# EAGLE board VusbPlusWiggle0602 (EAGLE 5.07)
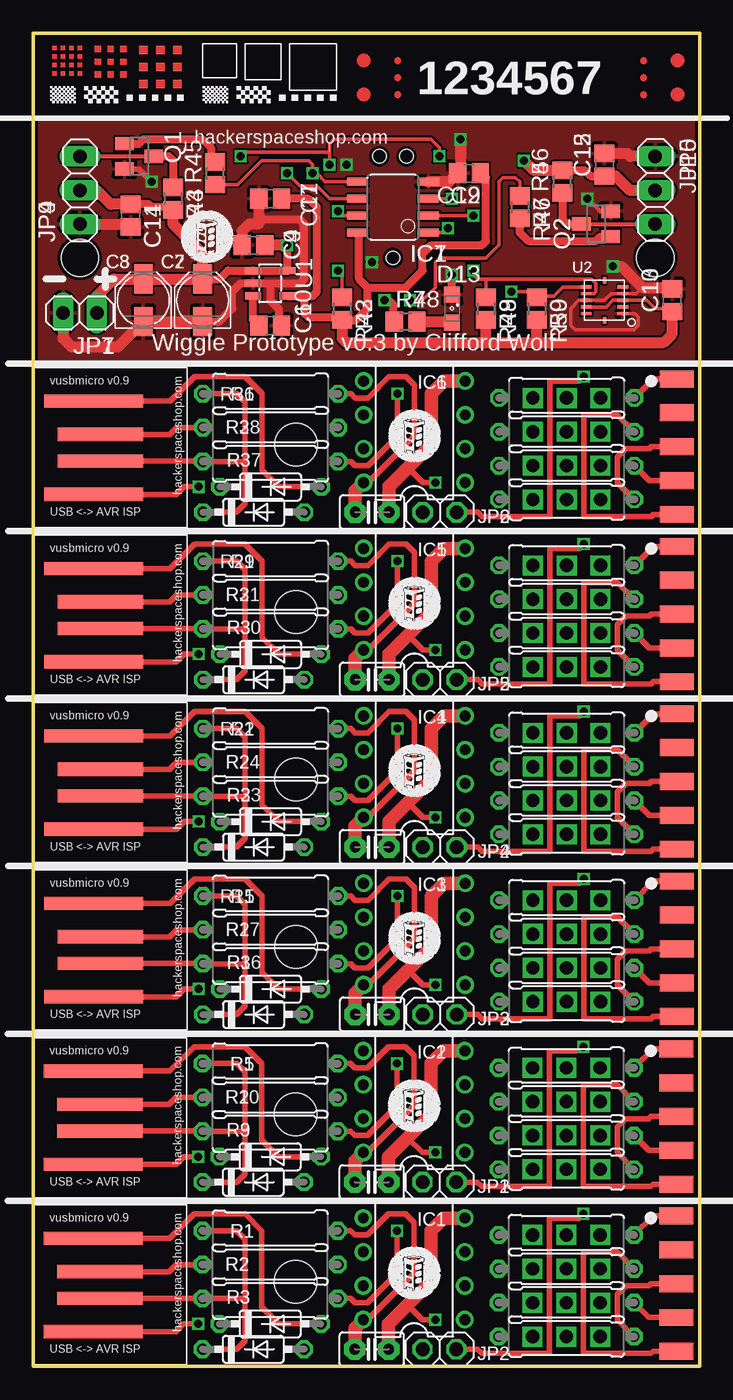
[diagram p0: board, top side]
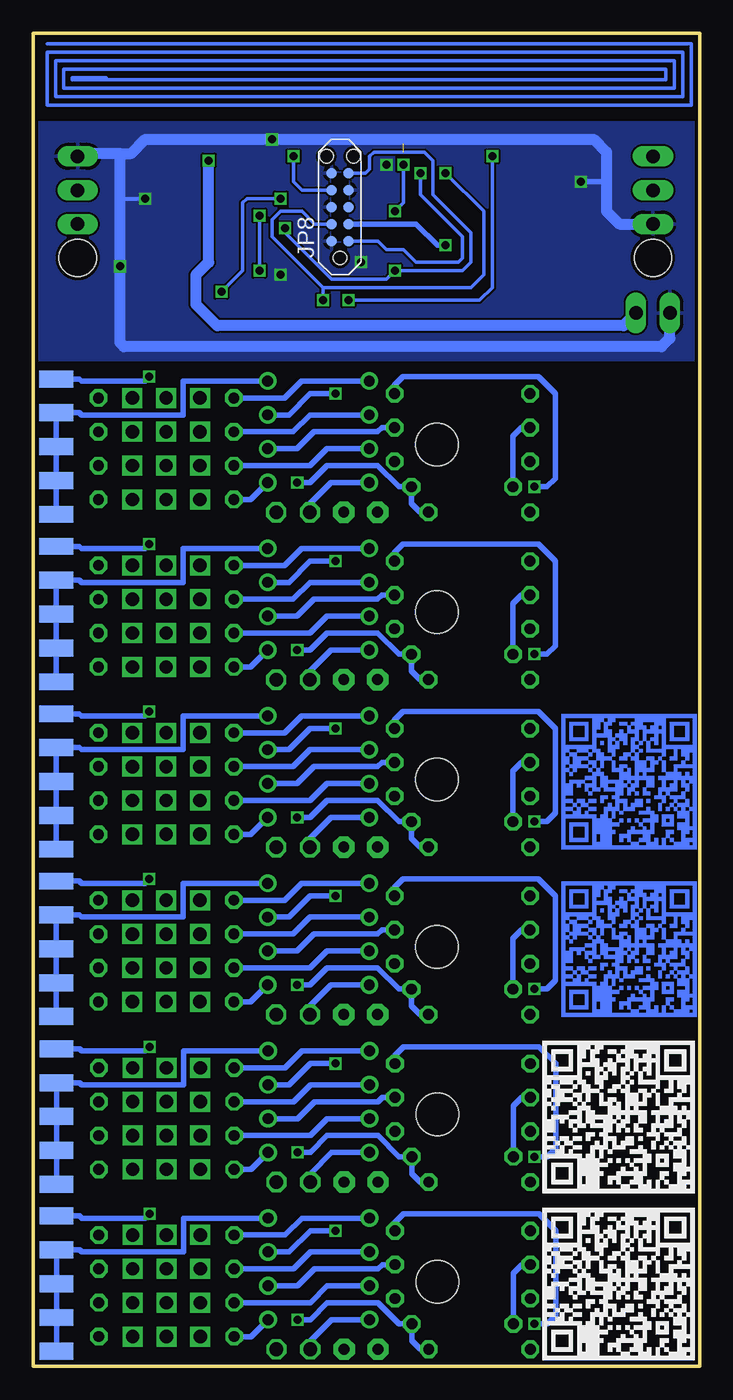
[diagram p1: board, bottom side, seen from below]

Size 50 x 100 mm. Coordinates in mm from the lower left corner, seen from the top.
Outline: 0,100 50,100 50,0 0,0 0,100
Copper layers (1*16): Top 0.035mm / dielectric 1.5mm / Bottom 0.035mm
Design rules "seeed": minimum track width 6mil, minimum drill 12mil, track to track 6mil, track to pad 6mil, pad to pad 6mil, via to via 6mil, smd to smd 0mil, copper to edge 10mil, drill to drill 10mil, minimum pad ring 10mil, minimum via ring 6mil, stop-mask expansion 2mil, vias tented up to drill 100mil, thermal gap 10mil
Net classes: 1 pwr: width 0.254 mm
Holes 3.2 mm at 19.68,6.35 19.68,18.89 19.71,31.47 19.71,44.03 19.71,56.59 19.71,69.15
Holes 2.8 mm at 3.5,83.15 46.67,83.15

## Footprints (pad centres in the part's own frame; a part is rotated, then mirrored left to right if it is on the bottom)
C2.5-2 = drill 0.813 pad 1.6 octagon: 1 -1.27,0; 2 1.27,0
PANASONIC_B = smd 2.2 x 1.4: + 1.6,0; - -1.6,0
C0805 = smd 1.3 x 1.5: 1 -0.85,0; 2 0.85,0
DO35-7 = drill 0.813 octagon: A 3.81,0; C -3.81,0
SML0805 = smd 1.2 x 1.2: A 1.05,0; C -1.05,0
DIL08 = drill 0.813 round: 1 -3.81,-3.81; 2 -1.27,-3.81; 3 1.27,-3.81; 4 3.81,-3.81; 5 3.81,3.81; 6 1.27,3.81; 7 -1.27,3.81; 8 -3.81,3.81
8S1 = smd 0.6 x 1.6: 1 -1.905,-2.654; 2 -0.645,-2.654; 3 0.625,-2.654; 4 1.895,-2.654; 5 1.905,2.654; 6 0.635,2.654; 7 -0.635,2.654; 8 -1.905,2.654
1X02 = drill 1.016 octagon: 1 -1.27,0; 2 1.27,0
1X02' = drill 1.016 long: 1 -1.27,0; 2 1.27,0
TC2050-IDC-NL = smd 0.787 x 0.787: 1 1.27,-0.635; 2 2.54,-0.635; 3 3.81,-0.635; 4 5.08,-0.635; 5 6.35,-0.635; 6 6.35,0.635; 7 5.08,0.635; 8 3.81,0.635; 9 2.54,0.635; 10 1.27,0.635 | hole 1.016: 0,0; 7.62,1.016; 7.62,-1.016
1X03 = drill 1.016 long: 1 -2.54,0; 2 0,0; 3 2.54,0
SMD1,27-2,54 = smd 1.27 x 2.54: 1 0,0
SOT23 = smd 1 x 1.4: 1 -0.95,-1.1; 2 0.95,-1.1; 3 0,1.1
0309/10 = drill 0.813 octagon: 1 -5.08,0; 2 5.08,0
R0805 = smd 1.3 x 1.5: 1 -0.85,0; 2 0.85,0
SOT23-5L = smd 0.55 x 1.2: 1 -0.95,-1.3; 2 0,-1.3; 3 0.95,-1.3; 4 0.95,1.3; 5 -0.95,1.3
DFN10 = smd 0.8 x 0.25: 1 -1.375,1; 2 -1.375,0.5; 3 -1.375,0; 4 -1.375,-0.5; 5 -1.375,-1; 6 1.375,-1; 7 1.375,-0.5; 8 1.375,0; 9 1.375,0.5; 10 1.375,1 | smd 0.25 x 0.5: 11 0,-1.5; 12 0,1.5
USB_A_EDGE = smd 6.41 x 1: P$1 0,1; P$2 0,-1 | smd 7.41 x 1: P$3 -0.5,3.5; P$4 -0.5,-3.5

## Placement (x,y rotation side)
C1  0.1uF  [C2.5-2]  25.4,1.27 180 top
C2  0.1uF  [C2.5-2]  25.4,13.81 180 top
C3  0.1uF  [C2.5-2]  25.43,26.39 180 top
C4  0.1uF  [C2.5-2]  25.43,38.95 180 top
C5  0.1uF  [C2.5-2]  25.43,51.51 180 top
C6  0.1uF  [C2.5-2]  25.43,64.07 180 top
C7  10u  [PANASONIC_B]  12.7,79.97 90 top
C8  1u  [PANASONIC_B]  8.26,79.97 90 top
C9  100n  [C0805]  16.51,84.1 180 top
C10  10n  [C0805]  17.78,78.07 0 top
C11  100n  [C0805]  17.78,87.59 180 top
C12  100n  [C0805]  32.7,89.5 180 top
C13  100n  [C0805]  47.95,79.97 90 top
C14  100n  [C0805]  7.3,86.32 270 top
C15  100n  [C0805]  42.87,90.13 90 top
D1  ZD3V6  [DO35-7]  16.51,1.27 0 top
D2  ZD3V6  [DO35-7]  17.78,3.17 0 top
D3  ZD3V6  [DO35-7]  16.51,13.81 0 top
D4  ZD3V6  [DO35-7]  17.78,15.72 0 top
D5  ZD3V6  [DO35-7]  16.54,26.39 0 top
D6  ZD3V6  [DO35-7]  17.81,28.29 0 top
D7  ZD3V6  [DO35-7]  16.54,38.95 0 top
D8  ZD3V6  [DO35-7]  17.81,40.85 0 top
D9  ZD3V6  [DO35-7]  16.54,51.51 0 top
D10  ZD3V6  [DO35-7]  17.81,53.41 0 top
D11  ZD3V6  [DO35-7]  16.54,64.07 0 top
D12  ZD3V6  [DO35-7]  17.81,65.98 0 top
D13  [SML0805]  31.43,79.34 270 top
E$1  [QR_TOP]  10.34,26.24 0 bottom
E$2  [QR_TOP]  10.34,38.8 0 bottom
E$3  [QR_TSTOP]  10.34,51.2 0 bottom
E$4  [QR_TSTOP]  10.34,63.76 0 bottom
IC1  ATTINY45  [DIL08]  28.57,7.3 90 top
IC2  ATTINY45  [DIL08]  28.57,19.84 90 top
IC3  ATTINY45  [DIL08]  28.6,32.42 90 top
IC4  ATTINY45  [DIL08]  28.6,44.98 90 top
IC5  ATTINY45  [DIL08]  28.6,57.54 90 top
IC6  ATTINY45  [DIL08]  28.6,70.1 90 top
IC7  TINY13V-10SSU  [8S1]  26.99,86.96 90 top
JP1  VCC-jumper  [1X02]  30.48,13.81 0 top
JP2  VCC-jumper  [1X02]  30.48,1.27 0 top
JP3  VCC-jumper  [1X02]  30.51,26.39 0 top
JP4  VCC-jumper  [1X02]  30.51,38.95 0 top
JP5  VCC-jumper  [1X02]  30.51,51.51 0 top
JP6  VCC-jumper  [1X02]  30.51,64.07 0 top
JP7  [1X02']  3.5,79.02 180 top
JP8  [TC2050-IDC-NL]  26.99,83.15 90 bottom
JP9  [1X03]  3.5,88.23 90 top
JP10  [1X03]  46.67,88.23 270 top
PAD1-VCC  [SMD1,27-2,54]  48.26,11.27 90 bottom
PAD1-VCC1  [SMD1,27-2,54]  48.26,23.81 90 bottom
PAD1-VCC2  [SMD1,27-2,54]  48.29,36.39 90 bottom
PAD1-VCC3  [SMD1,27-2,54]  48.29,48.95 90 bottom
PAD1-VCC4  [SMD1,27-2,54]  48.29,61.51 90 bottom
PAD1-VCC5  [SMD1,27-2,54]  48.29,74.07 90 bottom
PAD2-GND  [SMD1,27-2,54]  48.26,8.73 90 bottom
PAD2-GND1  [SMD1,27-2,54]  48.26,21.27 90 bottom
PAD2-GND2  [SMD1,27-2,54]  48.29,33.85 90 bottom
PAD2-GND3  [SMD1,27-2,54]  48.29,46.41 90 bottom
PAD2-GND4  [SMD1,27-2,54]  48.29,58.97 90 bottom
PAD2-GND5  [SMD1,27-2,54]  48.29,71.53 90 bottom
PAD3-GND  [SMD1,27-2,54]  48.26,6.19 90 bottom
PAD3-GND1  [SMD1,27-2,54]  48.26,18.73 90 bottom
PAD3-GND2  [SMD1,27-2,54]  48.29,31.31 90 bottom
PAD3-GND3  [SMD1,27-2,54]  48.29,43.87 90 bottom
PAD3-GND4  [SMD1,27-2,54]  48.29,56.43 90 bottom
PAD3-GND5  [SMD1,27-2,54]  48.29,68.99 90 bottom
PAD4-GND  [SMD1,27-2,54]  48.26,3.65 90 bottom
PAD4-GND1  [SMD1,27-2,54]  48.26,16.19 90 bottom
PAD4-GND2  [SMD1,27-2,54]  48.29,28.77 90 bottom
PAD4-GND3  [SMD1,27-2,54]  48.29,41.33 90 bottom
PAD4-GND4  [SMD1,27-2,54]  48.29,53.89 90 bottom
PAD4-GND5  [SMD1,27-2,54]  48.29,66.45 90 bottom
PAD5-GND  [SMD1,27-2,54]  48.26,1.11 90 bottom
PAD5-GND1  [SMD1,27-2,54]  48.26,13.65 90 bottom
PAD5-GND2  [SMD1,27-2,54]  48.29,26.23 90 bottom
PAD5-GND3  [SMD1,27-2,54]  48.29,38.79 90 bottom
PAD5-GND4  [SMD1,27-2,54]  48.29,51.35 90 bottom
PAD5-GND5  [SMD1,27-2,54]  48.29,63.91 90 bottom
PAD6-MOSI  [SMD1,27-2,54]  48.26,11.27 90 top
PAD6-MOSI1  [SMD1,27-2,54]  48.26,23.81 90 top
PAD6-MOSI2  [SMD1,27-2,54]  48.29,36.39 90 top
PAD6-MOSI3  [SMD1,27-2,54]  48.29,48.95 90 top
PAD6-MOSI4  [SMD1,27-2,54]  48.29,61.51 90 top
PAD6-MOSI5  [SMD1,27-2,54]  48.29,74.07 90 top
PAD7-NC  [SMD1,27-2,54]  48.26,8.73 90 top
PAD7-NC1  [SMD1,27-2,54]  48.26,21.27 90 top
PAD7-NC2  [SMD1,27-2,54]  48.29,33.85 90 top
PAD7-NC3  [SMD1,27-2,54]  48.29,46.41 90 top
PAD7-NC4  [SMD1,27-2,54]  48.29,58.97 90 top
PAD7-NC5  [SMD1,27-2,54]  48.29,71.53 90 top
PAD8-RST  [SMD1,27-2,54]  48.26,6.19 90 top
PAD8-RST1  [SMD1,27-2,54]  48.26,18.73 90 top
PAD8-RST2  [SMD1,27-2,54]  48.29,31.31 90 top
PAD8-RST3  [SMD1,27-2,54]  48.29,43.87 90 top
PAD8-RST4  [SMD1,27-2,54]  48.29,56.43 90 top
PAD8-RST5  [SMD1,27-2,54]  48.29,68.99 90 top
PAD9-SCK  [SMD1,27-2,54]  48.26,3.65 90 top
PAD9-SCK1  [SMD1,27-2,54]  48.26,16.19 90 top
PAD9-SCK2  [SMD1,27-2,54]  48.29,28.77 90 top
PAD9-SCK3  [SMD1,27-2,54]  48.29,41.33 90 top
PAD9-SCK4  [SMD1,27-2,54]  48.29,53.89 90 top
PAD9-SCK5  [SMD1,27-2,54]  48.29,66.45 90 top
PAD10-MISO  [SMD1,27-2,54]  48.26,1.11 90 top
PAD10-MISO1  [SMD1,27-2,54]  48.26,13.65 90 top
PAD10-MISO2  [SMD1,27-2,54]  48.29,26.23 90 top
PAD10-MISO3  [SMD1,27-2,54]  48.29,38.79 90 top
PAD10-MISO4  [SMD1,27-2,54]  48.29,51.35 90 top
PAD10-MISO5  [SMD1,27-2,54]  48.29,63.91 90 top
Q1  BC847SMD  [SOT23]  7.94,90.77 270 top
Q2  BC847SMD  [SOT23]  42.23,85.69 90 top
R1  1k5  [0309/10]  17.78,10.16 180 top
R2  68  [0309/10]  17.78,7.62 0 top
R3  68  [0309/10]  17.78,5.08 0 top
R4  1k  [0309/10]  40.01,9.84 0 top
R5  1k5  [0309/10]  17.78,22.7 180 top
R6  1k  [0309/10]  40.01,2.22 0 top
R7  1k  [0309/10]  40.01,4.76 0 top
R8  1k  [0309/10]  40.01,7.3 0 top
R9  68  [0309/10]  17.78,17.62 0 top
R10  68  [0309/10]  17.78,20.16 0 top
R11  1k  [0309/10]  40.01,22.38 0 top
R12  1k  [0309/10]  40.01,14.76 0 top
R13  1k  [0309/10]  40.01,17.3 0 top
R14  1k  [0309/10]  40.01,19.84 0 top
R15  1k5  [0309/10]  17.81,35.28 180 top
R16  68  [0309/10]  17.81,30.2 0 top
R17  68  [0309/10]  17.81,32.74 0 top
R18  1k  [0309/10]  40.03,34.96 0 top
R19  1k  [0309/10]  40.03,27.34 0 top
R20  1k  [0309/10]  40.03,29.88 0 top
R21  1k  [0309/10]  40.03,32.42 0 top
R22  1k5  [0309/10]  17.81,47.84 180 top
R23  68  [0309/10]  17.81,42.76 0 top
R24  68  [0309/10]  17.81,45.3 0 top
R25  1k  [0309/10]  40.03,47.52 0 top
R26  1k  [0309/10]  40.03,39.9 0 top
R27  1k  [0309/10]  40.03,42.44 0 top
R28  1k  [0309/10]  40.03,44.98 0 top
R29  1k5  [0309/10]  17.81,60.4 180 top
R30  68  [0309/10]  17.81,55.32 0 top
R31  68  [0309/10]  17.81,57.86 0 top
R32  1k  [0309/10]  40.03,60.08 0 top
R33  1k  [0309/10]  40.03,52.46 0 top
R34  1k  [0309/10]  40.03,55 0 top
R35  1k  [0309/10]  40.03,57.54 0 top
R36  1k5  [0309/10]  17.81,72.96 180 top
R37  68  [0309/10]  17.81,67.88 0 top
R38  68  [0309/10]  17.81,70.42 0 top
R39  1k  [0309/10]  40.03,72.64 0 top
R40  1k  [0309/10]  40.03,65.02 0 top
R41  1k  [0309/10]  40.03,67.56 0 top
R42  1k  [0309/10]  40.03,70.1 0 top
R43  1k  [R0805]  23.18,79.34 270 top
R44  1k  [R0805]  10.48,87.59 270 top
R45  1k  [R0805]  13.65,89.5 90 top
R46  1k  [R0805]  39.69,88.86 90 top
R47  1k  [R0805]  36.52,86.96 270 top
R48  220  [R0805]  27.94,78.39 0 top
R49  4k7  [R0805]  33.98,79.34 270 top
R50  4k7  [R0805]  37.78,79.34 270 top
U1  NJM2863F  [SOT23-5L]  17.78,81.24 270 top
U2  MMA7660FC_DFN10  [DFN10]  42.87,79.97 180 top
U$1  USB_A_EDGE  [USB_A_EDGE]  5,6.1 0 top
U$2  [METALAB_SMALL]  28.57,6.99 0 top
U$3  [QR]  11.75,0.48 0 bottom
U$4  USB_A_EDGE  [USB_A_EDGE]  5,18.64 0 top
U$5  [METALAB_SMALL]  28.57,19.53 0 top
U$6  [QR]  11.75,13.02 0 bottom
U$7  USB_A_EDGE  [USB_A_EDGE]  5.03,31.22 0 top
U$8  [METALAB_SMALL]  28.6,32.1 0 top
U$10  USB_A_EDGE  [USB_A_EDGE]  5.03,43.78 0 top
U$11  [METALAB_SMALL]  28.6,44.66 0 top
U$13  USB_A_EDGE  [USB_A_EDGE]  5.03,56.34 0 top
U$14  [METALAB_SMALL]  28.6,57.23 0 top
U$16  USB_A_EDGE  [USB_A_EDGE]  5.03,68.9 0 top
U$17  [METALAB_SMALL]  28.6,69.79 0 top
U$19  [METALAB]  13.02,84.74 0 top

## Library data of the parts
C1-C6 = capacitor-wima
C7-C15 R43-R50 = resistor
D1-D12 JP1-JP6 U$1 U$3 U$4 U$6 U$7 U$10 U$13 U$16 = vusbtiny
D13 = led
E$1-E$4 = VusbPlusWiggle0602
IC1-IC6 = mp_prog
IC7 JP8 U1 = parts
JP7 JP9 JP10 = mpc_pinhead
PAD1-VCC PAD1-VCC1-PAD1-VCC5 PAD2-GND PAD2-GND1-PAD2-GND5 PAD3-GND PAD3-GND1-PAD3-GND5 PAD4-GND PAD4-GND1-PAD4-GND5 PAD5-GND PAD5-GND1-PAD5-GND5 PAD6-MOSI PAD6-MOSI1-PAD6-MOSI5 PAD7-NC PAD7-NC1-PAD7-NC5 PAD8-RST PAD8-RST1-PAD8-RST5 PAD9-SCK PAD9-SCK1-PAD9-SCK5 PAD10-MISO PAD10-MISO1-PAD10-MISO5 = wirepad
Q1 Q2 = transistor-npn
R1-R42 = mp_passive
U2 = ICs_v54
U$2 U$5 U$8 U$11 U$14 U$17 U$19 = mp_metalab

## Nets
+5V [pwr]: C7.+ C8.+ C9.1 C14.1 C15.1 JP7.1 JP8.2 JP9.2 JP10.2 R44.2 R46.2 U1.1 U1.5
GND: C1.1 D1.A D2.A IC1.4 PAD2-GND.1 PAD3-GND.1 PAD4-GND.1 PAD5-GND.1 U$1.P$3
GND1: C2.1 D3.A D4.A IC2.4 PAD2-GND1.1 PAD3-GND1.1 PAD4-GND1.1 PAD5-GND1.1 U$4.P$3
GND2: C3.1 D5.A D6.A IC3.4 PAD2-GND2.1 PAD3-GND2.1 PAD4-GND2.1 PAD5-GND2.1 U$7.P$3
GND3: C4.1 D7.A D8.A IC4.4 PAD2-GND3.1 PAD3-GND3.1 PAD4-GND3.1 PAD5-GND3.1 U$10.P$3
GND4: C5.1 D9.A D10.A IC5.4 PAD2-GND4.1 PAD3-GND4.1 PAD4-GND4.1 PAD5-GND4.1 U$13.P$3
GND5: C6.1 D11.A D12.A IC6.4 PAD2-GND5.1 PAD3-GND5.1 PAD4-GND5.1 PAD5-GND5.1 U$16.P$3
GND6 [pwr]: C7.- C8.- C9.2 C10.2 C11.2 C12.2 C13.2 C14.2 C15.2 D13.C IC7.4 JP7.2 JP8.4 JP8.6 JP8.8 JP8.10 JP9.1 JP10.1 Q1.2 Q2.2 U1.2 U2.1 U2.4 U2.8
MISO: IC1.6 R8.1
MISO1: IC2.6 R14.1
MISO2: IC3.6 R21.1
MISO3: IC4.6 R28.1
MISO4: IC5.6 R35.1
MISO5: IC6.6 R42.1
MISO6: IC7.6 JP8.9 R47.1
MOSI: IC1.5 R4.1
MOSI1: IC2.5 R11.1
MOSI2: IC3.5 R18.1
MOSI3: IC4.5 R25.1
MOSI4: IC5.5 R32.1
MOSI5: IC6.5 R39.1
MOSI6: IC7.5 JP8.1 R45.1
N$1: IC1.3 R3.2
N$2: IC1.2 R2.2
N$3: D1.C R1.2 R3.1 U$1.P$2
N$4: JP2.2 PAD1-VCC.1
N$5: PAD6-MOSI.1 R4.2
N$6: D2.C R2.1 U$1.P$1
N$7: PAD8-RST.1 R6.2
N$8: PAD9-SCK.1 R7.2
N$9: PAD10-MISO.1 R8.2
N$22: IC2.3 R9.2
N$23: IC2.2 R10.2
N$24: D3.C R5.2 R9.1 U$4.P$2
N$25: D4.C R10.1 U$4.P$1
N$26: JP1.2 PAD1-VCC1.1
N$27: PAD6-MOSI1.1 R11.2
N$28: PAD8-RST1.1 R12.2
N$29: PAD9-SCK1.1 R13.2
N$30: PAD10-MISO1.1 R14.2
N$43: IC3.3 R16.2
N$44: IC3.2 R17.2
N$45: D5.C R15.2 R16.1 U$7.P$2
N$46: D6.C R17.1 U$7.P$1
N$47: JP3.2 PAD1-VCC2.1
N$48: PAD6-MOSI2.1 R18.2
N$49: PAD8-RST2.1 R19.2
N$50: PAD9-SCK2.1 R20.2
N$51: PAD10-MISO2.1 R21.2
N$64: IC4.3 R23.2
N$65: IC4.2 R24.2
N$66: D7.C R22.2 R23.1 U$10.P$2
N$67: D8.C R24.1 U$10.P$1
N$68: JP4.2 PAD1-VCC3.1
N$69: PAD6-MOSI3.1 R25.2
N$70: PAD8-RST3.1 R26.2
N$71: PAD9-SCK3.1 R27.2
N$72: PAD10-MISO3.1 R28.2
N$85: IC5.3 R30.2
N$86: IC5.2 R31.2
N$87: D9.C R29.2 R30.1 U$13.P$2
N$88: D10.C R31.1 U$13.P$1
N$89: JP5.2 PAD1-VCC4.1
N$90: PAD6-MOSI4.1 R32.2
N$91: PAD8-RST4.1 R33.2
N$92: PAD9-SCK4.1 R34.2
N$93: PAD10-MISO4.1 R35.2
N$106: IC6.3 R37.2
N$107: IC6.2 R38.2
N$108: D11.C R36.2 R37.1 U$16.P$2
N$109: D12.C R38.1 U$16.P$1
N$110: JP6.2 PAD1-VCC5.1
N$111: PAD6-MOSI5.1 R39.2
N$112: PAD8-RST5.1 R40.2
N$113: PAD9-SCK5.1 R41.2
N$114: PAD10-MISO5.1 R42.2
N$127: C10.1 U1.3
N$128: JP9.3 Q1.3 R44.1
N$129: Q1.1 R45.2
N$130: JP10.3 Q2.3 R46.1
N$131: Q2.1 R47.2
N$132: D13.A R48.2
NC: PAD7-NC.1
NC1: PAD7-NC1.1
NC2: PAD7-NC2.1
NC3: PAD7-NC3.1
NC4: PAD7-NC4.1
NC5: PAD7-NC5.1
RESET: IC7.1 JP8.5 R43.1
RST: IC1.1 R6.1
RST1: IC2.1 R12.1
RST2: IC3.1 R19.1
RST3: IC4.1 R26.1
RST4: IC5.1 R33.1
RST5: IC6.1 R40.1
SCK: IC1.7 R7.1
SCK1: IC2.7 R13.1
SCK2: IC3.7 R20.1
SCK3: IC4.7 R27.1
SCK4: IC5.7 R34.1
SCK5: IC6.7 R41.1
SCK6: IC7.7 JP8.7 R48.1
SCL: IC7.3 R50.1 U2.6
SDA: IC7.2 R49.1 U2.7
VCC: C1.2 IC1.8 JP2.1 R1.1 U$1.P$4
VCC1: C2.2 IC2.8 JP1.1 R5.1 U$4.P$4
VCC2: C3.2 IC3.8 JP3.1 R15.1 U$7.P$4
VCC3: C4.2 IC4.8 JP4.1 R22.1 U$10.P$4
VCC4: C5.2 IC5.8 JP5.1 R29.1 U$13.P$4
VCC5: C6.2 IC6.8 JP6.1 R36.1 U$16.P$4
VCC6 [pwr]: C11.1 C12.1 C13.1 IC7.8 R43.2 R49.2 R50.2 U1.4 U2.3 U2.9

## Tracks (layer width: path | path; a pad name or v marks a point on that pad's centre or on a via)
+5V  (via drill 0.6)
  Top 0.61: C7.+ 13.98,81.57 14.61,82.2 U1.1 U1.5 19.08,84.07 v19.05,84.1 | C14.1 8.68,87.17 8.89,86.96 10.27,86.96 R44.2 | R46.2 41.38,89.71 41.81,89.28 C15.1
  Top 0.813: JP7.1 4.76,80.29 6.05,81.57 C8.+ C7.+ 12.7,83.47 10.48,85.69 R44.2 | C14.1 5.82,87.17 4.76,88.23 JP9.2 | C15.1 43.72,89.28 44.77,88.23 JP10.2 | R46.2 37.57,89.71 v36.83,90.45 | v19.05,84.1 C9.1
  Bottom 0.406: v19.05,84.1 19.69,84.1 21.27,85.69 JP8.2
  Bottom 0.813: v36.83,90.45 36.83,82.83 37.78,81.88 37.78,79.66 36.2,78.07 5.72,78.07 JP7.1
GND  (via drill 0.6)
  Top 0.406: D2.A 18.41,3.17 17.14,4.45 17.14,10.16 15.88,11.43 12.06,11.43 10.23,9.6 U$1.P$3 | v30.16,3.49 29.21,3.49 28.1,4.6
  Top 1.016: C1.1 26.67,3.17 28.1,4.6 29.84,6.35 29.84,10.16 30.8,11.11 IC1.4
  Bottom 0.406: PAD5-GND.1 PAD4-GND.1 PAD3-GND.1 PAD2-GND.1 46.51,8.73 46.35,8.57 38.73,8.57 38.73,11.11 IC1.4 | D1.A 20.95,1.27 21.59,1.91 D2.A 22.54,3.17 24.13,4.76 27.94,4.76 29.21,3.49 v30.16,3.49
GND1  (via drill 0.6)
  Top 0.406: D4.A 18.41,15.72 17.14,16.99 17.14,22.7 15.88,23.97 12.06,23.97 10.23,22.14 U$4.P$3 | v30.16,16.03 29.21,16.03 28.1,17.14
  Top 1.016: C2.1 26.67,15.72 28.1,17.14 29.84,18.89 29.84,22.7 30.8,23.65 IC2.4
  Bottom 0.406: PAD5-GND1.1 PAD4-GND1.1 PAD3-GND1.1 PAD2-GND1.1 46.51,21.27 46.35,21.11 38.73,21.11 38.73,23.65 IC2.4 | D3.A 20.95,13.81 21.59,14.45 D4.A 22.54,15.72 24.13,17.3 27.94,17.3 29.21,16.03 v30.16,16.03
GND2  (via drill 0.6)
  Top 0.406: D6.A 18.44,28.29 17.17,29.56 17.17,35.28 15.9,36.55 12.09,36.55 10.26,34.72 U$7.P$3 | v30.19,28.61 29.24,28.61 28.12,29.72
  Top 1.016: C3.1 26.7,28.29 28.12,29.72 29.87,31.47 29.87,35.28 30.82,36.23 IC3.4
  Bottom 0.406: PAD5-GND2.1 PAD4-GND2.1 PAD3-GND2.1 PAD2-GND2.1 46.54,33.85 46.38,33.69 38.76,33.69 38.76,36.23 IC3.4 | D5.A 20.98,26.39 21.62,27.02 D6.A 22.57,28.29 24.16,29.88 27.97,29.88 29.24,28.61 v30.19,28.61
GND3  (via drill 0.6)
  Top 0.406: D8.A 18.44,40.85 17.17,42.12 17.17,47.84 15.9,49.11 12.09,49.11 10.26,47.28 U$10.P$3 | v30.19,41.17 29.24,41.17 28.12,42.28
  Top 1.016: C4.1 26.7,40.85 28.12,42.28 29.87,44.03 29.87,47.84 30.82,48.79 IC4.4
  Bottom 0.406: PAD5-GND3.1 PAD4-GND3.1 PAD3-GND3.1 PAD2-GND3.1 46.54,46.41 46.38,46.25 38.76,46.25 38.76,48.79 IC4.4 | D7.A 20.98,38.95 21.62,39.58 D8.A 22.57,40.85 24.16,42.44 27.97,42.44 29.24,41.17 v30.19,41.17
GND4  (via drill 0.6)
  Top 0.406: D10.A 18.44,53.41 17.17,54.69 17.17,60.4 15.9,61.67 12.09,61.67 10.26,59.84 U$13.P$3 | v30.19,53.73 29.24,53.73 28.12,54.84
  Top 1.016: C5.1 26.7,53.41 28.12,54.84 29.87,56.59 29.87,60.4 30.82,61.35 IC5.4
  Bottom 0.406: PAD5-GND4.1 PAD4-GND4.1 PAD3-GND4.1 PAD2-GND4.1 46.54,58.97 46.38,58.81 38.76,58.81 38.76,61.35 IC5.4 | D9.A 20.98,51.51 21.62,52.15 D10.A 22.57,53.41 24.16,55 27.97,55 29.24,53.73 v30.19,53.73
GND5  (via drill 0.6)
  Top 0.406: D12.A 18.44,65.98 17.17,67.25 17.17,72.96 15.9,74.23 12.09,74.23 10.26,72.4 U$16.P$3 | v30.19,66.29 29.24,66.29 28.12,67.41
  Top 1.016: C6.1 26.7,65.98 28.12,67.41 29.87,69.15 29.87,72.96 30.82,73.91 IC6.4
  Bottom 0.406: PAD5-GND5.1 PAD4-GND5.1 PAD3-GND5.1 PAD2-GND5.1 46.54,71.53 46.38,71.37 38.76,71.37 38.76,73.91 IC6.4 | D11.A 20.98,64.07 21.62,64.71 D12.A 22.57,65.98 24.16,67.56 27.97,67.56 29.24,66.29 v30.19,66.29
GND6  (via drill 0.6)
  Top 0.254: U2.1 45.13,78.97 45.41,78.7 45.41,78.07 45.09,77.75 40.64,77.75 40.33,78.07 40.33,79.34 40.96,79.97 U2.8 42.87,79.97 43.37,80.47 U2.4 45.27,80.47 45.72,80.93
  Top 0.305: Q2.2 42.55,86.64 v41.59,87.59 | 47.84,80.93 C13.2
  Top 0.406: Q1.2 7.94,89.82 v8.89,88.86
  Top 0.61: IC7.4 29.65,88.86 | C7.- 13.96,78.37 14.93,79.34 14.93,80.61 15.56,81.24 U1.2 17.78,81.24 | C10.2 18.42,78.28 18.42,79.34 17.78,79.97 17.78,81.24 | 17.78,81.24 20,81.24 20.32,81.56 20.32,85.69 20,86.01 17.25,86.01 16.93,85.69 | D13.C v31.43,81.88
  Top 0.813: JP7.2 2.23,77.12 2.86,76.48 6.37,76.48 C8.- C7.- | JP9.1 7.09,85.69 C14.2 | C15.2 44.55,90.98 44.77,90.77 JP10.1 | C11.2 16.93,85.69 16.2,85.69 15.66,85.16 C9.2 | IC7.4 31.21,88.85 C12.2 32.07,89.71 v32.07,92.04 | 47.84,80.93 45.72,80.93 44.13,82.51 v43.5,82.51
  Bottom 0.305: v41.59,87.59 43.18,87.59 43.5,87.91
  Bottom 0.406: 6.99,88.86 v8.89,88.86
  Bottom 0.813: JP7.2 2.23,77.12 2.86,76.48 43.18,76.48 43.5,76.8 v43.5,82.51 43.5,87.91 43.5,90.98 | JP10.1 46.46,90.98 43.5,90.98 | 43.5,90.98 42.65,90.98 41.59,92.04 v32.07,92.04 7.94,92.04 6.99,91.09 6.99,88.86 6.99,86.64 6.04,85.69 JP9.1
  other vias: 25.4,82.83 23.5,90.13
  pour Bottom: 0.32,93.31 0.32,75.53 49.85,75.53 49.85,93.31
  pour Top: 0.32,93.31 0.32,75.53 49.85,75.53 49.85,93.31
MISO
  Bottom 0.406: IC1.6 29.21,8.57 30.48,7.3 R8.1
MISO1
  Bottom 0.406: IC2.6 29.21,21.11 30.48,19.84 R14.1
MISO2
  Bottom 0.406: IC3.6 29.24,33.69 30.51,32.42 R21.1
MISO3
  Bottom 0.406: IC4.6 29.24,46.25 30.51,44.98 R28.1
MISO4
  Bottom 0.406: IC5.6 29.24,58.81 30.51,57.54 R35.1
MISO5
  Bottom 0.406: IC6.6 29.24,71.37 30.51,70.1 R42.1
MISO6  (via drill 0.6)
  Top 0.254: IC7.6 22.23,87.59 21.27,88.55 20,88.55 v19.05,89.5 | R47.1 36.52,88.86 36.2,89.18 35.24,89.18 34.93,88.86 34.93,84.1 33.98,83.15 30.48,83.15 30.16,82.83 30.16,80.93 29.21,79.97 v28.26,79.97 28.58,79.97
  Bottom 0.254: JP8.9 28.89,85.69 29.85,86.64 31.43,86.64 32.07,86.01 32.07,84.74 28.26,80.93 | 28.26,80.93 v28.26,79.97 | v19.05,89.5 16.2,86.64 16.2,81.88 17.15,80.93 28.26,80.93
MOSI
  Bottom 0.406: IC1.5 29.84,11.11 31.11,9.84 R4.1
MOSI1
  Bottom 0.406: IC2.5 29.84,23.65 31.11,22.38 R11.1
MOSI2
  Bottom 0.406: IC3.5 29.87,36.23 31.14,34.96 R18.1
MOSI3
  Bottom 0.406: IC4.5 29.87,48.79 31.14,47.52 R25.1
MOSI4
  Bottom 0.406: IC5.5 29.87,61.35 31.14,60.08 R32.1
MOSI5
  Bottom 0.406: IC6.5 29.87,73.91 31.14,72.64 R39.1
MOSI6  (via drill 0.6)
  Top 0.254: IC7.5 21.91,88.86 21.27,89.5 v20.96,89.5 20.96,90.13 20.64,90.45 17.15,90.45 15.35,88.65 R45.1
  Bottom 0.254: JP8.1 24.13,84.42 23.5,83.78 22.23,83.78 21.27,82.83 18.1,82.83 17.78,83.15 17.78,84.74 20.96,87.91 v20.96,89.5
N$1  (via drill 0.6)
  Top 0.406: v27.3,10.16 27.3,6.99 25.08,4.76 24.13,4.76 23.81,5.08 R3.2
  Bottom 0.406: IC1.3 30.8,8.57 29.21,10.16 v27.3,10.16
N$2
  Bottom 0.406: R2.2 23.81,7.62 24.13,7.3 28.89,7.3 30.16,6.03 IC1.2
N$3
  Top 0.406: R1.2 15.24,10.16 15.88,9.53 15.88,5.08 | D1.C 15.24,1.27 15.88,1.91 15.88,5.08 | 15.88,5.08 R3.1 12.68,5.1 U$1.P$2
N$4  (via drill 0.6)
  Top 0.406: JP2.2 33.34,1.27 33.66,0.95 38.73,0.95 38.73,11.11 40.96,11.11 v41.27,11.43
  Bottom 0.406: v41.27,11.43 41.59,11.11 46.35,11.11 46.51,11.27 PAD1-VCC.1
N$5
  Top 0.406: R4.2 46.51,11.27 PAD6-MOSI.1
N$6
  Top 0.406: R2.1 10.72,7.62 10.2,7.1 U$1.P$1
  Bottom 0.406: D2.C 13.97,6.99 13.34,7.62 R2.1
N$7
  Top 0.406: R6.2 43.81,3.49 43.81,5.4 44.45,6.03 46.2,6.03 46.35,6.19 PAD8-RST.1
N$8
  Top 0.406: R7.2 46.2,3.65 PAD9-SCK.1
N$9
  Top 0.406: R8.2 43.81,8.57 41.27,8.57 41.27,0.95 46.35,0.95 46.51,1.11 PAD10-MISO.1
N$10  (via drill 1)
  other vias: 40.01,9.84
N$11  (via drill 1)
  other vias: 42.55,7.3
N$12  (via drill 1)
  other vias: 40.01,4.76
N$13  (via drill 1)
  other vias: 42.55,2.22
N$14  (via drill 1)
  other vias: 42.55,9.84
N$15  (via drill 1)
  other vias: 37.47,9.84
N$16  (via drill 1)
  other vias: 37.47,7.3
N$17  (via drill 1)
  other vias: 40.01,7.3
N$18  (via drill 1)
  other vias: 42.55,4.76
N$19  (via drill 1)
  other vias: 37.47,4.76
N$20  (via drill 1)
  other vias: 37.47,2.22
N$21  (via drill 1)
  other vias: 40.01,2.22
N$22  (via drill 0.6)
  Top 0.406: v27.3,22.7 27.3,19.53 25.08,17.3 24.13,17.3 23.81,17.62 R9.2
  Bottom 0.406: IC2.3 30.8,21.11 29.21,22.7 v27.3,22.7
N$23
  Bottom 0.406: R10.2 23.81,20.16 24.13,19.84 28.89,19.84 30.16,18.57 IC2.2
N$24
  Top 0.406: R5.2 15.24,22.7 15.88,22.07 15.88,17.62 | D3.C 15.24,13.81 15.88,14.45 15.88,17.62 | 15.88,17.62 R9.1 12.68,17.64 U$4.P$2
N$25
  Top 0.406: R10.1 10.72,20.16 10.2,19.64 U$4.P$1
  Bottom 0.406: D4.C 13.97,19.53 13.34,20.16 R10.1
N$26  (via drill 0.6)
  Top 0.406: JP1.2 33.34,13.81 33.66,13.49 38.73,13.49 38.73,23.65 40.96,23.65 v41.27,23.97
  Bottom 0.406: v41.27,23.97 41.59,23.65 46.35,23.65 46.51,23.81 PAD1-VCC1.1
N$27
  Top 0.406: R11.2 46.51,23.81 PAD6-MOSI1.1
N$28
  Top 0.406: R12.2 43.81,16.03 43.81,17.94 44.45,18.57 46.2,18.57 46.35,18.73 PAD8-RST1.1
N$29
  Top 0.406: R13.2 46.2,16.19 PAD9-SCK1.1
N$30
  Top 0.406: R14.2 43.81,21.11 41.27,21.11 41.27,13.49 46.35,13.49 46.51,13.65 PAD10-MISO1.1
N$31  (via drill 1)
  other vias: 42.55,22.38
N$32  (via drill 1)
  other vias: 40.01,22.38
N$33  (via drill 1)
  other vias: 37.47,22.38
N$34  (via drill 1)
  other vias: 37.47,19.84
N$35  (via drill 1)
  other vias: 42.55,19.84
N$36  (via drill 1)
  other vias: 40.01,19.84
N$37  (via drill 1)
  other vias: 42.55,17.3
N$38  (via drill 1)
  other vias: 40.01,17.3
N$39  (via drill 1)
  other vias: 37.47,17.3
N$40  (via drill 1)
  other vias: 37.47,14.76
N$41  (via drill 1)
  other vias: 42.55,14.76
N$42  (via drill 1)
  other vias: 40.01,14.76
N$43  (via drill 0.6)
  Top 0.406: v27.33,35.28 27.33,32.1 25.11,29.88 24.16,29.88 23.84,30.2 R16.2
  Bottom 0.406: IC3.3 30.82,33.69 29.24,35.28 v27.33,35.28
N$44
  Bottom 0.406: R17.2 23.84,32.74 24.16,32.42 28.92,32.42 30.19,31.15 IC3.2
N$45
  Top 0.406: R15.2 15.27,35.28 15.9,34.64 15.9,30.2 | D5.C 15.27,26.39 15.9,27.02 15.9,30.2 | 15.9,30.2 R16.1 12.71,30.22 U$7.P$2
N$46
  Top 0.406: R17.1 10.75,32.74 10.23,32.22 U$7.P$1
  Bottom 0.406: D6.C 14,32.1 13.36,32.74 R17.1
N$47  (via drill 0.6)
  Top 0.406: JP3.2 33.36,26.39 33.68,26.07 38.76,26.07 38.76,36.23 40.98,36.23 v41.3,36.55
  Bottom 0.406: v41.3,36.55 41.62,36.23 46.38,36.23 46.54,36.39 PAD1-VCC2.1
N$48
  Top 0.406: R18.2 46.54,36.39 PAD6-MOSI2.1
N$49
  Top 0.406: R19.2 43.84,28.61 43.84,30.52 44.48,31.15 46.22,31.15 46.38,31.31 PAD8-RST2.1
N$50
  Top 0.406: R20.2 46.22,28.77 PAD9-SCK2.1
N$51
  Top 0.406: R21.2 43.84,33.69 41.3,33.69 41.3,26.07 46.38,26.07 46.54,26.23 PAD10-MISO2.1
N$52  (via drill 1)
  other vias: 42.57,34.96
N$53  (via drill 1)
  other vias: 40.03,34.96
N$54  (via drill 1)
  other vias: 37.49,34.96
N$55  (via drill 1)
  other vias: 37.49,32.42
N$56  (via drill 1)
  other vias: 42.57,32.42
N$57  (via drill 1)
  other vias: 40.03,32.42
N$58  (via drill 1)
  other vias: 42.57,29.88
N$59  (via drill 1)
  other vias: 40.03,29.88
N$60  (via drill 1)
  other vias: 37.49,29.88
N$61  (via drill 1)
  other vias: 37.49,27.34
N$62  (via drill 1)
  other vias: 42.57,27.34
N$63  (via drill 1)
  other vias: 40.03,27.34
N$64  (via drill 0.6)
  Top 0.406: v27.33,47.84 27.33,44.66 25.11,42.44 24.16,42.44 23.84,42.76 R23.2
  Bottom 0.406: IC4.3 30.82,46.25 29.24,47.84 v27.33,47.84
N$65
  Bottom 0.406: R24.2 23.84,45.3 24.16,44.98 28.92,44.98 30.19,43.71 IC4.2
N$66
  Top 0.406: R22.2 15.27,47.84 15.9,47.2 15.9,42.76 | D7.C 15.27,38.95 15.9,39.58 15.9,42.76 | 15.9,42.76 R23.1 12.71,42.78 U$10.P$2
N$67
  Top 0.406: R24.1 10.75,45.3 10.23,44.78 U$10.P$1
  Bottom 0.406: D8.C 14,44.66 13.36,45.3 R24.1
N$68  (via drill 0.6)
  Top 0.406: JP4.2 33.36,38.95 33.68,38.63 38.76,38.63 38.76,48.79 40.98,48.79 v41.3,49.11
  Bottom 0.406: v41.3,49.11 41.62,48.79 46.38,48.79 46.54,48.95 PAD1-VCC3.1
N$69
  Top 0.406: R25.2 46.54,48.95 PAD6-MOSI3.1
N$70
  Top 0.406: R26.2 43.84,41.17 43.84,43.08 44.48,43.71 46.22,43.71 46.38,43.87 PAD8-RST3.1
N$71
  Top 0.406: R27.2 46.22,41.33 PAD9-SCK3.1
N$72
  Top 0.406: R28.2 43.84,46.25 41.3,46.25 41.3,38.63 46.38,38.63 46.54,38.79 PAD10-MISO3.1
N$73  (via drill 1)
  other vias: 42.57,47.52
N$74  (via drill 1)
  other vias: 40.03,47.52
N$75  (via drill 1)
  other vias: 37.49,47.52
N$76  (via drill 1)
  other vias: 37.49,44.98
N$77  (via drill 1)
  other vias: 42.57,44.98
N$78  (via drill 1)
  other vias: 40.03,44.98
N$79  (via drill 1)
  other vias: 42.57,42.44
N$80  (via drill 1)
  other vias: 40.03,42.44
N$81  (via drill 1)
  other vias: 37.49,42.44
N$82  (via drill 1)
  other vias: 37.49,39.9
N$83  (via drill 1)
  other vias: 42.57,39.9
N$84  (via drill 1)
  other vias: 40.03,39.9
N$85  (via drill 0.6)
  Top 0.406: v27.33,60.4 27.33,57.23 25.11,55 24.16,55 23.84,55.32 R30.2
  Bottom 0.406: IC5.3 30.82,58.81 29.24,60.4 v27.33,60.4
N$86
  Bottom 0.406: R31.2 23.84,57.86 24.16,57.54 28.92,57.54 30.19,56.27 IC5.2
N$87
  Top 0.406: R29.2 15.27,60.4 15.9,59.77 15.9,55.32 | D9.C 15.27,51.51 15.9,52.15 15.9,55.32 | 15.9,55.32 R30.1 12.71,55.34 U$13.P$2
N$88
  Top 0.406: R31.1 10.75,57.86 10.23,57.34 U$13.P$1
  Bottom 0.406: D10.C 14,57.23 13.36,57.86 R31.1
N$89  (via drill 0.6)
  Top 0.406: JP5.2 33.36,51.51 33.68,51.19 38.76,51.19 38.76,61.35 40.98,61.35 v41.3,61.67
  Bottom 0.406: v41.3,61.67 41.62,61.35 46.38,61.35 46.54,61.51 PAD1-VCC4.1
N$90
  Top 0.406: R32.2 46.54,61.51 PAD6-MOSI4.1
N$91
  Top 0.406: R33.2 43.84,53.73 43.84,55.64 44.48,56.27 46.22,56.27 46.38,56.43 PAD8-RST4.1
N$92
  Top 0.406: R34.2 46.22,53.89 PAD9-SCK4.1
N$93
  Top 0.406: R35.2 43.84,58.81 41.3,58.81 41.3,51.19 46.38,51.19 46.54,51.35 PAD10-MISO4.1
N$94  (via drill 1)
  other vias: 42.57,60.08
N$95  (via drill 1)
  other vias: 40.03,60.08
N$96  (via drill 1)
  other vias: 37.49,60.08
N$97  (via drill 1)
  other vias: 37.49,57.54
N$98  (via drill 1)
  other vias: 42.57,57.54
N$99  (via drill 1)
  other vias: 40.03,57.54
N$100  (via drill 1)
  other vias: 42.57,55
N$101  (via drill 1)
  other vias: 40.03,55
N$102  (via drill 1)
  other vias: 37.49,55
N$103  (via drill 1)
  other vias: 37.49,52.46
N$104  (via drill 1)
  other vias: 42.57,52.46
N$105  (via drill 1)
  other vias: 40.03,52.46
N$106  (via drill 0.6)
  Top 0.406: v27.33,72.96 27.33,69.79 25.11,67.56 24.16,67.56 23.84,67.88 R37.2
  Bottom 0.406: IC6.3 30.82,71.37 29.24,72.96 v27.33,72.96
N$107
  Bottom 0.406: R38.2 23.84,70.42 24.16,70.1 28.92,70.1 30.19,68.83 IC6.2
N$108
  Top 0.406: R36.2 15.27,72.96 15.9,72.33 15.9,67.88 | D11.C 15.27,64.07 15.9,64.71 15.9,67.88 | 15.9,67.88 R37.1 12.71,67.9 U$16.P$2
N$109
  Top 0.406: R38.1 10.75,70.42 10.23,69.9 U$16.P$1
  Bottom 0.406: D12.C 14,69.79 13.36,70.42 R38.1
N$110  (via drill 0.6)
  Top 0.406: JP6.2 33.36,64.07 33.68,63.75 38.76,63.75 38.76,73.91 40.98,73.91 v41.3,74.23
  Bottom 0.406: v41.3,74.23 41.62,73.91 46.38,73.91 46.54,74.07 PAD1-VCC5.1
N$111
  Top 0.406: R39.2 46.54,74.07 PAD6-MOSI5.1
N$112
  Top 0.406: R40.2 43.84,66.29 43.84,68.2 44.48,68.83 46.22,68.83 46.38,68.99 PAD8-RST5.1
N$113
  Top 0.406: R41.2 46.22,66.45 PAD9-SCK5.1
N$114
  Top 0.406: R42.2 43.84,71.37 41.3,71.37 41.3,63.75 46.38,63.75 46.54,63.91 PAD10-MISO5.1
N$115  (via drill 1)
  other vias: 42.57,72.64
N$116  (via drill 1)
  other vias: 40.03,72.64
N$117  (via drill 1)
  other vias: 37.49,72.64
N$118  (via drill 1)
  other vias: 37.49,70.1
N$119  (via drill 1)
  other vias: 42.57,70.1
N$120  (via drill 1)
  other vias: 40.03,70.1
N$121  (via drill 1)
  other vias: 42.57,67.56
N$122  (via drill 1)
  other vias: 40.03,67.56
N$123  (via drill 1)
  other vias: 37.49,67.56
N$124  (via drill 1)
  other vias: 37.49,65.02
N$125  (via drill 1)
  other vias: 42.57,65.02
N$126  (via drill 1)
  other vias: 40.03,65.02
N$127
  Top 0.61: U1.3 16.48,78.52 C10.1
N$128
  Top 0.305: JP9.3 Q1.3
  Top 0.61: R44.1 10.48,90.45 10.16,90.77 Q1.3
N$129
  Top 0.61: R45.2 13.34,90.67 13.34,91.4 12.7,92.04 8.26,92.04 7.94,91.72 Q1.1
N$130
  Top 0.305: Q2.3 JP10.3
  Top 0.61: Q2.3 40.01,85.69 39.69,86.01 R46.1
N$131
  Top 0.61: R47.2 36.52,85.05 37.15,84.42 42.23,84.42 42.55,84.74 Q2.1
N$132
  Top 0.813: R48.2 31.34,78.39 D13.A
RESET  (via drill 0.6)
  Top 0.254: IC7.1 30.8,85.05 v31.12,85.37 | R43.1 23.18,81.88 v22.86,82.2
  Bottom 0.254: v31.12,85.37 31.12,85.05 27.62,81.56 23.5,81.56 v22.86,82.2 17.78,82.2 17.15,82.83 17.15,85.05 20,87.91 20,90.45 20.64,91.09 24.45,91.09 24.77,90.77 24.77,89.82 25.09,89.5 JP8.5
RST
  Bottom 0.406: IC1.1 33.66,2.22 R6.1
RST1
  Bottom 0.406: IC2.1 33.66,14.76 R12.1
RST2
  Bottom 0.406: IC3.1 33.68,27.34 R19.1
RST3
  Bottom 0.406: IC4.1 33.68,39.9 R26.1
RST4
  Bottom 0.406: IC5.1 33.68,52.46 R33.1
RST5
  Bottom 0.406: IC6.1 33.68,65.02 R40.1
S$1
  Bottom 0.254: 48.97,99.22 0.64,99.22 0.64,94.61 48.97,94.61 48.97,98.58 1.27,98.58 1.27,95.24 48.34,95.24 48.34,97.95 1.91,97.95 1.91,95.88 47.7,95.88 47.7,97.31 2.54,97.31 2.54,96.52 47.06,96.52 47.06,96.67 44.52,96.67
SCK
  Bottom 0.406: IC1.7 27.94,6.03 29.21,4.76 R7.1
SCK1
  Bottom 0.406: IC2.7 27.94,18.57 29.21,17.3 R13.1
SCK2
  Bottom 0.406: IC3.7 27.97,31.15 29.24,29.88 R20.1
SCK3
  Bottom 0.406: IC4.7 27.97,43.71 29.24,42.44 R27.1
SCK4
  Bottom 0.406: IC5.7 27.97,56.27 29.24,55 R34.1
SCK5
  Bottom 0.406: IC6.7 27.97,68.83 29.24,67.56 R41.1
SCK6  (via drill 0.6)  (1 unrouted)
  Top 0.254: v30.48,90.77 30.48,91.4 29.85,92.04 22.55,92.04 22.23,91.72 v22.23,90.13 | v22.86,86.64 23.18,86.32 IC7.7 | v15.56,90.77 15.88,91.09 22.23,91.09
  Top 0.61: v26.36,79.97 26.67,79.97 26.99,79.66 26.99,78.49 R48.1
  Bottom 0.254: JP8.7 29.85,88.23 30.48,88.86 v30.48,90.77 | v26.36,79.97 16.51,79.97 15.56,80.93 v15.56,90.77 | v22.23,90.13 22.23,87.28 v22.86,86.64
SCL  (via drill 0.6)
  Top 0.254: U2.6 39.74,80.97 39.05,80.29 37.89,80.29 R50.1 37.37,80.61 v35.88,80.61 | IC7.3 v31.43,87.58 v31.43,87.59
  Bottom 0.254: v31.43,87.59 33.98,87.59 34.29,87.28 34.29,82.2 v35.88,80.61
SDA  (via drill 0.6)
  Top 0.254: U2.7 42.09,80.47 42.23,80.61 42.23,81.24 41.91,81.56 33.98,81.56 | IC7.2 v33.01,86.31 v33.02,86.32 | v33.02,82.2 33.02,81.88 33.34,81.56 33.98,81.56 | R49.1 33.98,81.56
  Bottom 0.254: v33.02,82.2 v33.02,86.32
VCC  (via drill 0.6)
  Top 0.406: IC1.8 25.08,3.49 28.57,6.99 28.57,10.79 27.94,11.43 26.67,11.43 25.08,9.84 24.13,9.84 23.81,10.16 R1.1 | v12.38,3.17 11.28,3.17 10.7,2.6 U$1.P$4
  Top 1.016: C1.2 24.13,2.86 IC1.8
  Bottom 0.406: v12.38,3.17 11.43,3.17 10.79,3.81 10.79,10.16 12.06,11.43 22.23,11.43 22.86,10.79 R1.1 | JP2.1 29.21,1.91 27.62,3.49 IC1.8
VCC1  (via drill 0.6)
  Top 0.406: IC2.8 25.08,16.03 28.57,19.53 28.57,23.34 27.94,23.97 26.67,23.97 25.08,22.38 24.13,22.38 23.81,22.7 R5.1 | v12.38,15.72 11.28,15.72 10.7,15.14 U$4.P$4
  Top 1.016: C2.2 24.13,15.4 IC2.8
  Bottom 0.406: v12.38,15.72 11.43,15.72 10.79,16.35 10.79,22.7 12.06,23.97 22.23,23.97 22.86,23.34 R5.1 | JP1.1 29.21,14.45 27.62,16.03 IC2.8
VCC2  (via drill 0.6)
  Top 0.406: IC3.8 25.11,28.61 28.6,32.1 28.6,35.91 27.97,36.55 26.7,36.55 25.11,34.96 24.16,34.96 23.84,35.28 R15.1 | v12.41,28.29 11.3,28.29 10.73,27.72 U$7.P$4
  Top 1.016: C3.2 24.16,27.98 IC3.8
  Bottom 0.406: v12.41,28.29 11.46,28.29 10.82,28.93 10.82,35.28 12.09,36.55 22.25,36.55 22.89,35.91 R15.1 | JP3.1 29.24,27.02 27.65,28.61 IC3.8
VCC3  (via drill 0.6)
  Top 0.406: IC4.8 25.11,41.17 28.6,44.66 28.6,48.47 27.97,49.11 26.7,49.11 25.11,47.52 24.16,47.52 23.84,47.84 R22.1 | v12.41,40.85 11.3,40.85 10.73,40.28 U$10.P$4
  Top 1.016: C4.2 24.16,40.54 IC4.8
  Bottom 0.406: v12.41,40.85 11.46,40.85 10.82,41.49 10.82,47.84 12.09,49.11 22.25,49.11 22.89,48.47 R22.1 | JP4.1 29.24,39.58 27.65,41.17 IC4.8
VCC4  (via drill 0.6)
  Top 0.406: IC5.8 25.11,53.73 28.6,57.23 28.6,61.03 27.97,61.67 26.7,61.67 25.11,60.08 24.16,60.08 23.84,60.4 R29.1 | v12.41,53.41 11.3,53.41 10.73,52.84 U$13.P$4
  Top 1.016: C5.2 24.16,53.1 IC5.8
  Bottom 0.406: v12.41,53.41 11.46,53.41 10.82,54.05 10.82,60.4 12.09,61.67 22.25,61.67 22.89,61.03 R29.1 | JP5.1 29.24,52.15 27.65,53.73 IC5.8
VCC5  (via drill 0.6)
  Top 0.406: IC6.8 25.11,66.29 28.6,69.79 28.6,73.6 27.97,74.23 26.7,74.23 25.11,72.64 24.16,72.64 23.84,72.96 R36.1 | v12.41,65.98 11.3,65.98 10.73,65.4 U$16.P$4
  Top 1.016: C6.2 24.16,65.66 IC6.8
  Bottom 0.406: v12.41,65.98 11.46,65.98 10.82,66.61 10.82,72.96 12.09,74.23 22.25,74.23 22.89,73.6 R36.1 | JP6.1 29.24,64.71 27.65,66.29 IC6.8
VCC6
  Top 0.254: C13.1 47.73,79.34 46.67,79.34 46.04,79.97 U2.3 43.5,79.97 43,79.47 U2.9
  Top 0.61: C12.1 33.66,89.5 33.98,89.18 33.98,84.42 33.66,84.1 29.85,84.1 29.21,83.47 29.21,82.2 27.94,80.93 25.09,80.93 | IC7.8 24.45,84.94 24.45,81.56 25.09,80.93 | U1.4 20,80.29 20.32,80.29 | 25.09,80.93 25.09,79.34 24.23,78.49 R43.2 22.96,78.7 20.64,78.7 20.32,79.02 20.32,80.29 | C11.1 20.64,87.59 21.27,86.96 21.27,80.61 20.96,80.29 20.32,80.29
  Top 0.813: C13.1 47.95,77.43 47.31,76.8 37.78,76.8 | 33.98,76.8 23.5,76.8 23.18,77.12 R43.2 | 33.98,76.8 37.78,76.8 | 37.78,76.8 R50.2 | 33.98,76.8 R49.2
(copper drawn outside any net)
  shapes: Top area x34, Top circle x10

## Text on the board
tPlace: 1234567 | hackerspaceshop.com | Wiggle Prototype v0.3 by Clifford Wolf | vusbmicro v0.9 | hackerspaceshop.com | USB <-> AVR ISP | hackerspaceshop.com | vusbmicro v0.9 | USB <-> AVR ISP | vusbmicro v0.9 | hackerspaceshop.com | USB <-> AVR ISP | hackerspaceshop.com | vusbmicro v0.9 | USB <-> AVR ISP | hackerspaceshop.com | vusbmicro v0.9 | USB <-> AVR ISP | vusbmicro v0.9 | hackerspaceshop.com | USB <-> AVR ISP
tValues: hackerspaceshop.com | vusbtiny++ 1.0
_tNames: Q1 | JP5 | R4 | C7 | C12 | R3 | C9 | R6 | R5 | C11 | C4 | JP4 | IC1 | Q2 | C3 | C2 | U1 | U2 | D1 | R2 | R8 | R9 | R7 | C10 | JP1 | C6 | R1 | IC1 | R2 | R3 | JP2 | R1 | IC1 | R2 | R3 | JP2 | R1 | IC1 | R2 | R3 | JP2 | R1 | IC1 | R2 | R3 | JP2 | R1 | IC1 | R2 | R3 | JP2 | R1 | IC1 | R2 | R3 | JP2
_hiddenNames: PAD1-VCC | PAD6-MOSI | R4 | PAD2-GND | PAD7-NC | R8 | PAD3-GND | PAD8-RST | R7 | PAD4-GND | PAD9-SCK | D2 | R6 | D1 | C1 | PAD5-GND | PAD10-MISO